# Altium PCB MainBoard.PcbDoc
Units mil, origin at the board's own origin, x right, y up, seen from the top; angles counter-clockwise.
Board outline 3900 x 3590 mil, 2 copper layers (Top Layer, Bottom Layer); 85 components, 109 nets, 361 pads, 95 vias.
Unrouted connection lines stored in the file: 1.
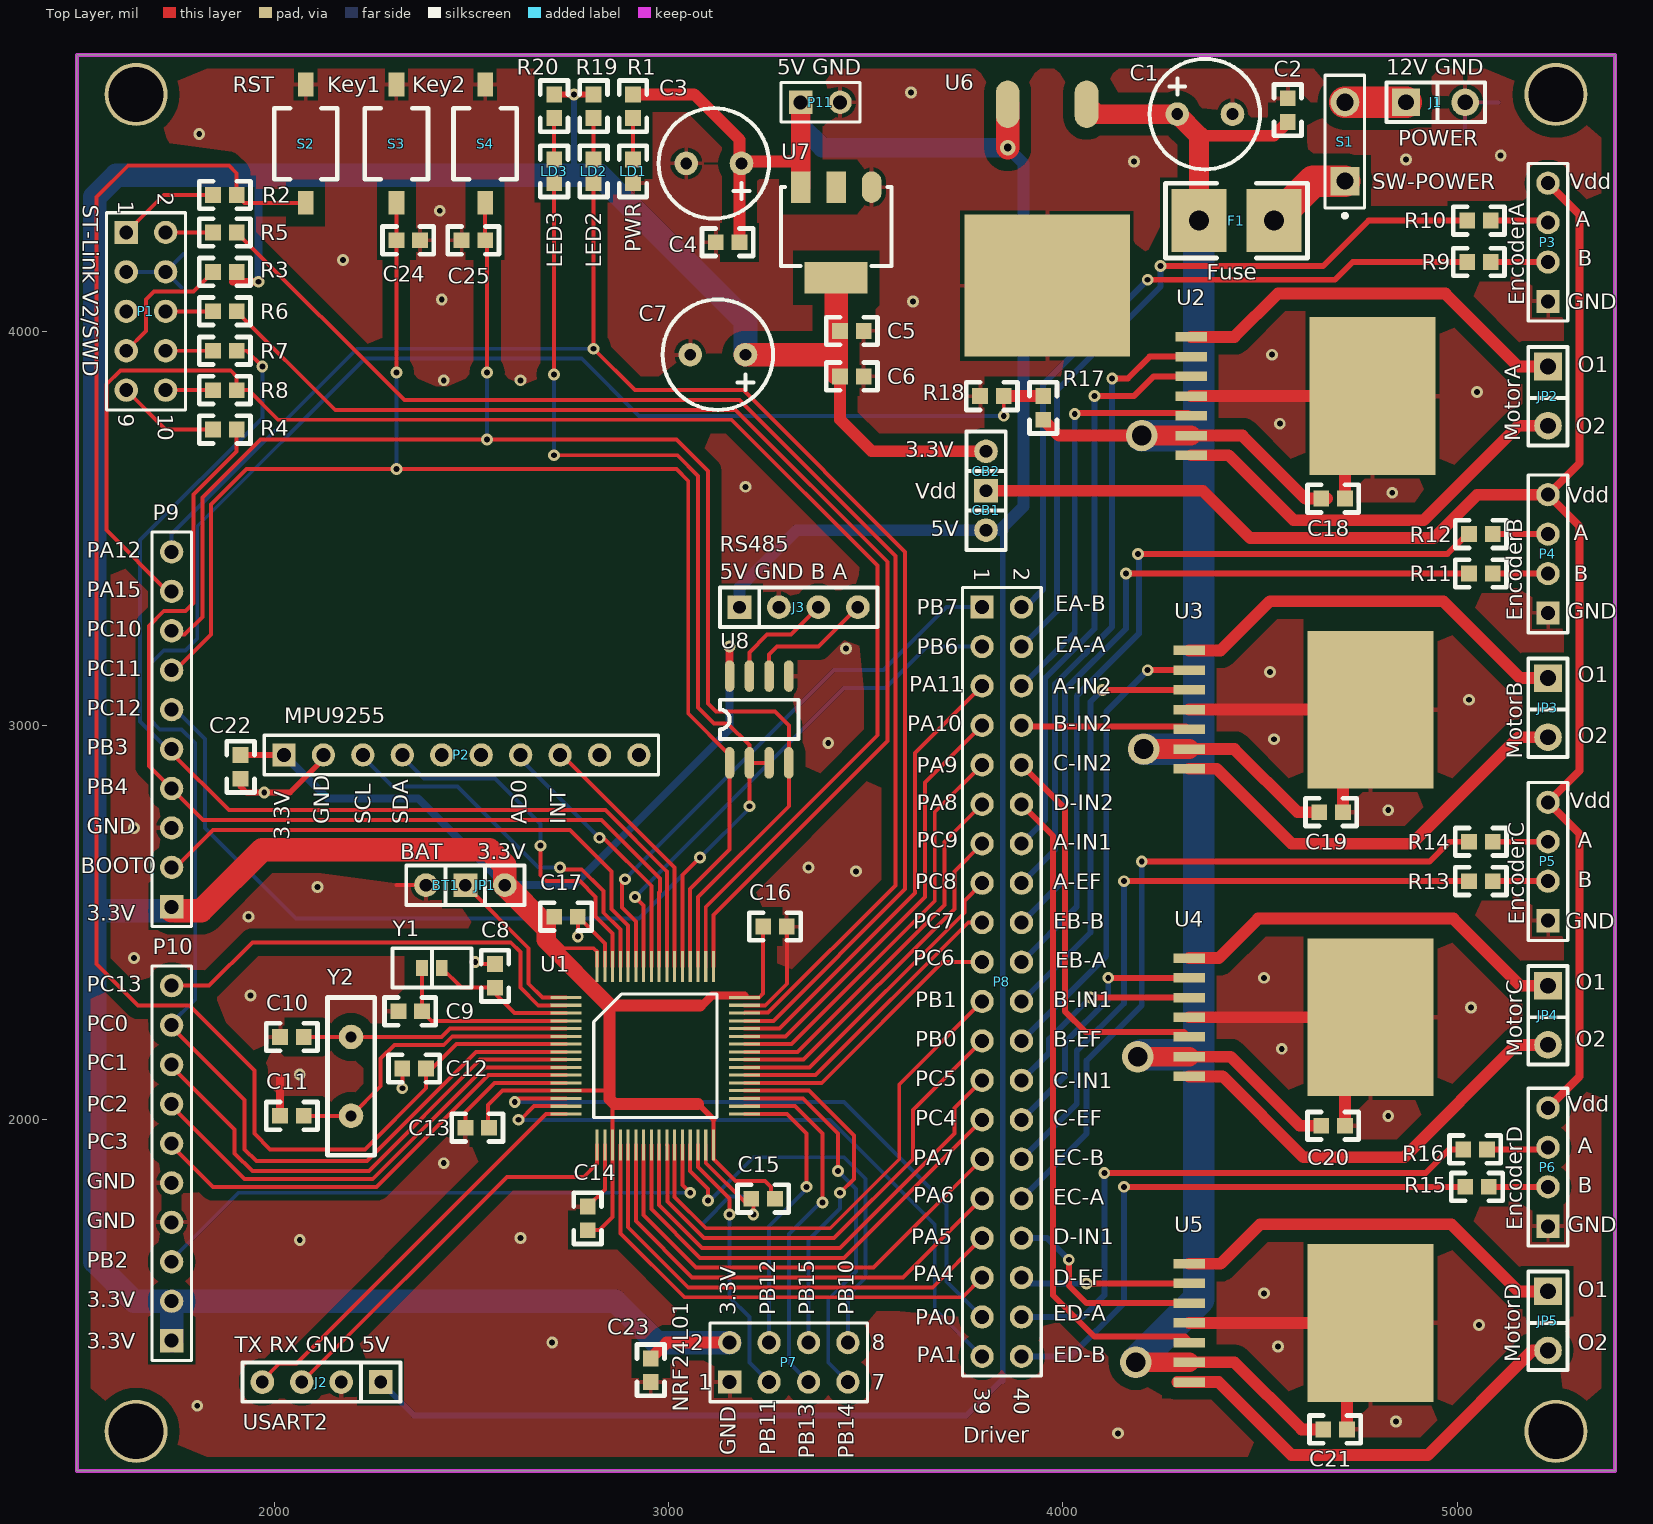
[diagram p0: Top Layer view]
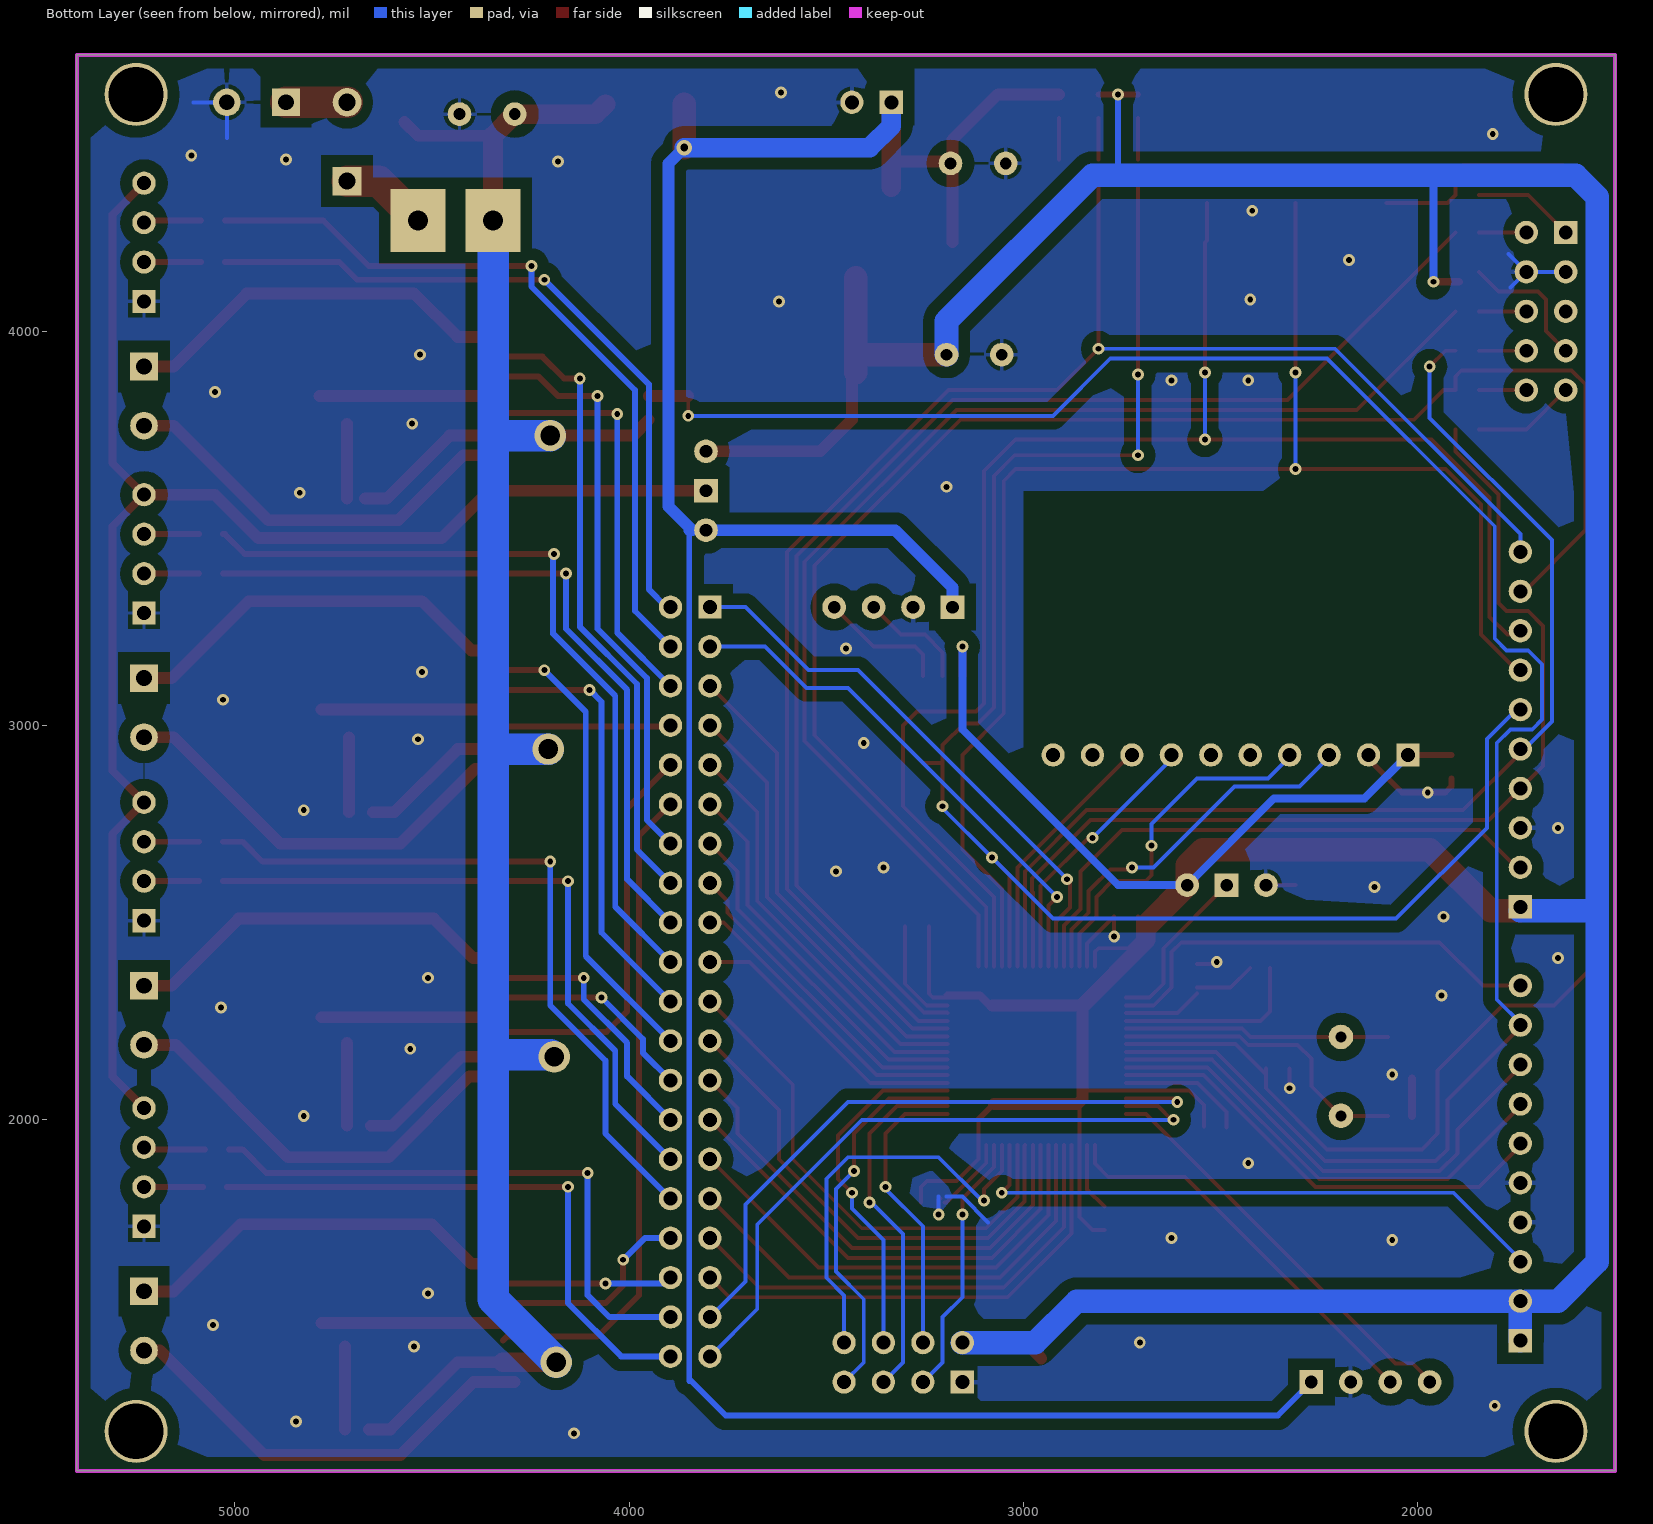
[diagram p1: Bottom Layer view, seen from below]

## Layer stack, top to bottom
Top Solder: solder mask 0.4, Solder Resist, Dk 3.5
Top Layer: signal copper 1.4
Dielectric 1: dielectric 12.6, FR-4, Dk 4.8
Bottom Layer: signal copper 1.4
Bottom Solder: solder mask 0.4, Solder Resist, Dk 3.5

## Board outline
1500,1110 1500,4700 5400,4700 5400,1110

## Design rules (kind name [scope] priority, off if disabled: settings)
Clearance Clearance_poly [InPolygon] p1: gap=30
Clearance [All] p2: gap=8
PolygonConnect PolygonConnect_Via [IsVia] p1: connectstyle=Direct reliefconductorwidth=10 reliefentries=4 polygonreliefangle="90 Angle" airgapwidth=10
PolygonConnect [All] p2: connectstyle=Relief reliefconductorwidth=10 reliefentries=4 polygonreliefangle="90 Angle" airgapwidth=10
RoomDefinition MainBoard [InComponentClass('MainBoard')] p1: confinementstyle=ConfineIn formatcopy=TRUE lockcomponents=FALSE outline 1500,4700 5385,4700 5400,4685 5390,4675 5390,1110 1515,1110 1500,1125
RoutingVias [All] p1: holewidth=28 width=50 viastyle="Through Hole" minholewidth=28 minwidth=50 maxholewidth=28 maxwidth=50
SolderMaskExpansion [All] p1: expansion=4
Width [All] p1: maxlimit=80 minlimit=10 preferedwidth=10
29 further rules are at their usual default settings.

## Components (designator, comment, footprint, x,y, rotation, side; value= is the part's Value field where it differs from the comment)
BT1 "BAT" "SIP2 - duplicate" 2485,2595 r180 top
C1 "470uF/50V" RB2 4290,4550 r0 top
C2 "Cap" 0603 4570,4590 r270 top
C3 "10uF/10V" RB2 3185,4425 r180 top
C4 "Cap" 0603 3120,4225 r0 top
C5 "Cap" 0603 3495,4000 r180 top
C6 "Cap" 0603 3495,3885 r180 top
C7 "47uF/10V" RB2 3195,3940 r180 top
C8 "20P" 0603 2560,2395 r270 top
C9 "20P" 0603 2315,2275 r0 top
C10 "20P" 0603 2075,2210 r180 top
C11 "20P" 0603 2075,2010 r180 top
C12 "" 0603 2385,2130 r180 top
C13 "Cap" 0603 2545,1980 r180 top
C14 "Cap" 0603 2795,1780 r270 top
C15 "Cap" 0603 3210,1800 r0 top
C16 "Cap" 0603 3240,2490 r0 top
C17 "Cap" 0603 2770,2515 r180 top
C18 "Cap" 0603 4715,3575 r180 top
C19 "Cap" 0603 4710,2780 r180 top
C20 "Cap" 0603 4715,1985 r180 top
C21 "Cap" 0603 4720,1215 r180 top
C22 "Cap" 0603 1915,2925 r270 top
C23 "Cap" 0603 2955,1395 r270 top
C24 "Cap" 0603 2370,4230 r180 top
C25 "Cap" 0603 2475,4230 r0 top
CB1 "5V" "SIP2 - duplicate" 3805,3595 r270 top
CB2 "3.3V" "SIP2 - duplicate" 3805,3595 r90 top
F1 "Fuse" 1808Shell 4345,4280 r0 top
J1 "POWER" SIP2-150 4870,4580 r0 top
J2 "USART2" sip4 2270,1335 r180 top
J3 "RS485" sip4 3180,3300 r0 top
JP1 "3.3V" "SIP2 - duplicate" 2485,2595 r0 top
JP2 "MotorA" SIP2-150 5230,3910 r270 top
JP3 "MotorB" SIP2-150 5230,3120 r270 top
JP4 "MotorC" SIP2-150 5230,2340 r270 top
JP5 "MotorD" SIP2-150 5230,1565 r270 top
LD1 "PWR" 0603 2910,4435 r270 top
LD2 "LED2" 0603 2810,4435 r270 top
LD3 "LED3" 0603 2710,4435 r270 top
P1 "ST-Link V2/SWD" HDR2X5 1625,4250 r270 top
P2 "MPU9255" HDR1X10 2025,2925 r0 top
P3 "EncoderA" HDR1X4 5230,4075 r90 top
P4 "EncoderB" HDR1X4 5230,3285 r90 top
P5 "EncoderC" HDR1X4 5230,2505 r90 top
P6 "EncoderD" HDR1X4 5230,1730 r90 top
P7 "NRF24L01" HDR2X4 3155,1335 r0 top
P8 "Driver" HDR2X20 3795,3300 r270 top
P9 "Header 10" HDR1X10 1740,2540 r90 top
P10 "Header 10" HDR1X10 1740,1440 r90 top
P11 "5V GND" HDR1X2 3335,4580 r0 top
R1 "1K" 0603 2910,4540 r90 top
R2 "22" 0603 1905,4345 r180 top
R3 "22" 0603 1905,4150 r180 top
R4 "22" 0603 1905,3750 r180 top
R5 "22" 0603 1845,4250 r0 top
R6 "22" 0603 1845,4050 r0 top
R7 "22" 0603 1845,3950 r0 top
R8 "22" 0603 1845,3850 r0 top
R9 "390" 0603 5085,4175 r180 top
R10 "390" 0603 5085,4280 r180 top
R11 "390" 0603 5090,3385 r180 top
R12 "390" 0603 5090,3485 r180 top
R13 "390" 0603 5090,2605 r180 top
R14 "390" 0603 5090,2705 r180 top
R15 "390" 0603 5080,1830 r180 top
R16 "390" 0603 5075,1925 r180 top
R17 "100K" 0603 3950,3835 r270 top
R18 "10K" 0603 3790,3835 r0 top
R19 "1K" 0603 2810,4540 r90 top
R20 "1K" 0603 2710,4540 r90 top
S1 "SW-POWER" SPST-2 4715,4480 r90 top
S2 "RST" key2 2080,4625 r180 top
S3 "Key1" key2 2310,4625 r180 top
S4 "Key2" key2 2535,4625 r180 top
U1 "" quad64 2740,2310 r0 top
U2 "TLE5205-2G" INF-PG-TO263-7-1_L 4325,3835 r0 top
U3 "TLE5205-2G" INF-PG-TO263-7-1_L 4320,3040 r0 top
U4 "TLE5205-2G" INF-PG-TO263-7-1_L 4320,2260 r0 top
U5 "TLE5205-2G" INF-PG-TO263-7-1_L 4320,1485 r0 top
U6 "7805" ktt 3960,4575 r90 top
U7 "LM1117" SPP3 3515,4365 r180 top
U8 "3082" so-8 3155,2905 r90 top
Y1 "32768" sip2 2350,2385 r0 top
Y2 "8M" XTAL1 2195,2210 r270 top

## Footprints (in the part's own frame and the unit in brackets; to place one, negate y for a bottom-side part, rotate by r counter-clockwise, add the part's x,y. Pads: shape width x height; smd on the part's side, far side on the other; paste and mask are expansions set on the pad)
0603 [mil]
  rect 40x40 smd: 1(0,0) 2(60,0)
  silkscreen extent -35,-35 95,35
1808Shell [mil]
  rect 140x160 hole 50: 1(0,0) 2(190,0)
  silkscreen extent -85,-95 275,95
HDR1X2 [mm] "Connector; Header; 2 Position"
  rect 1.5x1.5 hole 0.9: 1(0,0)
  round 1.5 hole 0.9: 2(2.54,0)
  silkscreen extent -1.27,-1.27 3.81,1.27
HDR1X4 [mm] "Connector; Header; 4 Position"
  rect 1.5x1.5 hole 0.9: 1(0,0)
  round 1.5 hole 0.9: 2(2.54,0) 3(5.08,0) 4(7.62,0)
  silkscreen extent -1.27,-1.27 8.89,1.27
HDR1X10 [mm] "Connector; Header; 10 Position"
  rect 1.5x1.5 hole 0.9: 1(0,0)
  round 1.5 hole 0.9: 2(2.54,0) 3(5.08,0) 4(7.62,0) 5(10.16,0) 6(12.7,0) 7(15.24,0) 8(17.78,0) 9(20.32,0) 10(22.86,0)
  silkscreen extent -1.27,-1.27 24.13,1.27
HDR2X4 [mm] "Connector; Header; 4x2 Position"
  rect 1.5x1.5 hole 0.9: 1(0,0)
  round 1.5 hole 0.9: 2(0,2.54) 3(2.54,0) 4(2.54,2.54) 5(5.08,0) 6(5.08,2.54) 7(7.62,0) 8(7.62,2.54)
  silkscreen extent -1.27,-1.27 8.89,3.81
HDR2X5 [mm] "Connector; Header; 5x2 Position"
  rect 1.5x1.5 hole 0.9: 1(0,0)
  round 1.5 hole 0.9: 2(0,2.54) 3(2.54,0) 4(2.54,2.54) 5(5.08,0) 6(5.08,2.54) 7(7.62,0) 8(7.62,2.54) 9(10.16,0) 10(10.16,2.54)
  silkscreen extent -1.27,-1.27 11.43,3.81
HDR2X20 [mm] "Connector; Header; 20x2 Position"
  rect 1.5x1.5 hole 0.9: 1(0,0)
  round 1.5 hole 0.9: 2(0,2.54) 3(2.54,0) 4(2.54,2.54) 5(5.08,0) 6(5.08,2.54) 7(7.62,0) 8(7.62,2.54) 9(10.16,0) 10(10.16,2.54) 11(12.7,0) 12(12.7,2.54) 13(15.24,0) 14(15.24,2.54) 15(17.78,0) 16(17.78,2.54) 17(20.32,0) 18(20.32,2.54) 19(22.86,0) 20(22.86,2.54) 21(25.4,0) 22(25.4,2.54) 23(27.94,0) 24(27.94,2.54) 25(30.48,0) 26(30.48,2.54) 27(33.02,0) 28(33.02,2.54) 29(35.56,0) 30(35.56,2.54) 31(38.1,0) 32(38.1,2.54) 33(40.64,0) 34(40.64,2.54) 35(43.18,0) 36(43.18,2.54) 37(45.72,0) 38(45.72,2.54) 39(48.26,0) 40(48.26,2.54)
  silkscreen extent -1.27,-1.27 49.53,3.81
INF-PG-TO263-7-1_L [mil] "DPAK, 8-Leads, Body 10x9.25mm, Pitch 1.27mm, IPC High Density"
  rect 80x24 smd: 1(0,150) 2(0,100) 3(0,50) 4(0,0) 5(0,-50) 6(0,-100) 7(0,-150)
  rect 320x400 smd: 8(460,0)
key2 [mil]
  rect 40x60 smd: 1(0,0) 2(0,300)
  silkscreen extent -80,60 80,240
ktt [mil]
  oval 120x60 smd: 1(0,-100) 3(0,100)
  rect 360x420 smd: 2(-460,0)
quad64 [mm]
  oval 2x0.2 smd: 1(0,0)
  rect 2x0.2 smd: 2(0,-0.5) 3(0,-1) 4(0,-1.5) 5(0,-2) 6(0,-2.5) 7(0,-3) 8(0,-3.5) 9(0,-4) 10(0,-4.5) 11(0,-5) 12(0,-5.5) 13(0,-6) 14(0,-6.5) 15(0,-7) 16(0,-7.5) 33(11.5,-7.5) 34(11.5,-7) 35(11.5,-6.5) 36(11.5,-6) 37(11.5,-5.5) 38(11.5,-5) 39(11.5,-4.5) 40(11.5,-4) 41(11.5,-3.5) 42(11.5,-3) 43(11.5,-2.5) 44(11.5,-2) 45(11.5,-1.5) 46(11.5,-1) 47(11.5,-0.5) 48(11.5,0)
  rect 0.2x2 smd: 17(2,-9.5) 18(2.5,-9.5) 19(3,-9.5) 20(3.5,-9.5) 21(4,-9.5) 22(4.5,-9.5) 23(5,-9.5) 24(5.5,-9.5) 25(6,-9.5) 26(6.5,-9.5) 27(7,-9.5) 28(7.5,-9.5) 29(8,-9.5) 30(8.5,-9.5) 31(9,-9.5) 32(9.5,-9.5) 49(9.5,2) 50(9,2) 51(8.5,2) 52(8,2) 53(7.5,2) 54(7,2) 55(6.5,2) 56(6,2) 57(5.5,2) 58(5,2) 59(4.5,2) 60(4,2) 61(3.5,2) 62(3,2) 63(2.5,2) 64(2,2)
  silkscreen extent 1.79,-7.71 9.71,0.22
RB2 [mil]
  round 60 hole 30: 1(0,0) 2(140,0)
  silkscreen extent -70,-140 210,140
sip2 [mil]
  rect 30x40 smd: 1(25,0) 2(75,0)
  silkscreen extent -50,-50 150,50
"SIP2 - duplicate" [mil]
  rect 60x60 hole 32: 1(0,0)
  round 60 hole 32: 2(100,0)
  silkscreen extent -50,-50 150,50
SIP2-150 [mil]
  rect 70x70 hole 40: 1(0,0)
  round 70 hole 40: 2(150,0)
  silkscreen extent -50,-50 200,50
sip4 [mil]
  rect 60x60 hole 32: 1(0,0)
  round 60 hole 32: 2(100,0) 3(200,0) 4(300,0)
  silkscreen extent -50,-50 350,50
so-8 [mil]
  oval 80x24 smd: 1(0,0) 2(0,-50) 3(0,-100) 4(0,-150) 5(220,-150) 6(220,-100) 7(220,-50) 8(220,0)
  silkscreen extent 60,-175 160,25
SPP3 [mil]
  oval 50x80 smd: 1(0,0)
  rect 50x80 smd: 2(90,0) 3(180,0)
  rect 160x80 smd: 4(90,230)
  silkscreen extent -50,0 230,200
SPST-2 [mm] "Switch; 2 Leads"
  rect 1.85x1.85 hole 1.1: 1(-2.54,0)
  round 1.85 hole 1.1: 2(2.54,0)
  silkscreen extent -4.89,-1.27 4.28,1.27
XTAL1 [mil]
  round 62 hole 28: 1(0,0) 2(200,0)
  silkscreen extent -100,-60 300,60

## Part data
BT1: library part BATTERY, "Battery"
C1 C3 C7: library part "CAP POL"
C2 C4 C5 C6 C13 C14 C15 C16 C17 C18 C19 C20 C21 C22 C23 C24 C25: "Capacitor"
C8 C9 C10 C11 C12: library part CAP, "Capacitor"
CB1 CB2: library part "Circuit Breaker", "Circuit Breaker"
F1: library part "Fuse 2"
J1 JP1: library part CON2, "Connector"
J2 J3: library part CON4, "Connector"
JP2 JP3 JP4 JP5 P11: library part "Header 2", "Header, 2-Pin"
LD1 LD2 LD3: library part PHOTO
P1: library part "Header 5X2", "Header, 5-Pin, Dual row"
P2: library part "Header 10", "Header, 10-Pin"
P3 P4 P5 P6: library part "Header 4", "Header, 4-Pin"
P7: library part "Header 4X2", "Header, 4-Pin, Dual row"
P8: library part "Header 20X2", "Header, 20-Pin, Dual row"
P9 P10: "Header, 10-Pin"
R1 R2 R3 R4 R5 R6 R7 R8 R17 R18 R19 R20: library part Resistor_ST, "Resistor 0402 / 0603 / 0805"
R9 R10 R11 R12 R13 R14 R15 R16: library part RES
S1: library part SW-SPST, "Single-Pole, Single-Throw Switch"
S2 S3 S4: library part SW-PB, "Switch"
U1: library part STM32F103R8
U2 U3 U4 U5: "5 A H-Bridge for DC-Motor Applications, 6 to 40 V, 220 mOhm RDS(on), PG-TO263-7-1, Reel, Green"
U6: library part LM330KC, "3-Terminal Positive Regulator"
U8: library part 75176
Y1 Y2: library part CRYSTAL, "Crystal"

## Free pads (board coordinates)
  round 80 hole 50: 0(4200,3735) 1(4205,2940) 2(4190,2160) 3(4185,1385)
  round 160 hole 140: 0(5250,1210) 1(5250,4600) 2(1650,4600) 3(1650,1210)

## Via types
v1: diameter 30, hole 15, Top Layer to Bottom Layer, 94 vias
v2: diameter 40, hole 20, Top Layer to Bottom Layer, 1 vias

## Nets (pads, with @x,y where several pads share a name; then routed paths per layer and width w, separated by ;. In a path a pad name is that pad's centre, name@x,y a point inside that pad or via, vN(x,y) a via of type N, cw(c..) or ccw(c..) an arc to the next point about the centre after c; other vN are vias at no path point)
3V3: C5.2 C6.2 C7.1 C13.1 C14.2 C15.2 C16.1 C17.2 C22.1 C23.1 CB2.2 JP1.2 P2.1 P7.2 P9.1 P10.1 P10.2 R3.1 R19.2 R20.2 U1.13 U1.19 U1.32 U1.48 U1.64 U7.2 U7.4 U8.8 | length 13999
  Top Layer w10: C13.1@2542.5,1982.5 2542.5,2037.5 2578.78,2073.78 U1.13 2841.22,2073.78 2850,2065 ; C17.2 2710,2460 2735,2435 2810,2435 2818.74,2426.26 U1.64 ; C14.2 2825,1720 2858.11,1753.11 U1.19 2858.11,2045 ; 3114.01,2000.98 U1.32 3114.01,1900.98 3170,1845 3245,1845 3260,1830 C15.2@3260,1790 ; U1.48 3230,2310 3240,2320 C16.1
  Top Layer w15: C22.1 P2.1 ; R20.2 v1(2760,4600) R19.2 ; 3075,2040 3114.01,2000.98
  Top Layer w20: 1895,4125 v1(1960,4125) ; 3080,2290 3085,2290 3110,2315 3192.76,2315 ; U8.8 v1(3155,3200)
  Top Layer w30: C23.1 2995,1435 P7.2 ; 3075,2040 2863.11,2040 2850,2053.11 2850,2065 2850,2290 3080,2290 ; C6.2 3435,3775 3515,3695 CB2.2
  Top Layer w40: 2685,2495 2685,2455 2850,2290
  Top Layer w60: P9.1@1740,2530 1815,2530 1970,2685 2545,2685 2585,2645 JP1.2@2585,2605 ; JP1.2 2685,2495 ; C7.1 3420,3940 ; C6.2@3425,3895 U7.4
  Bottom Layer w15: 2760,4395 v1(2760,4600)
  Bottom Layer w20: v1(1960,4125) 1960,4395 ; P2.1 2135,2815 2365,2815 JP1.2 2760,2595 3155,2990 v1(3155,3200)
  Bottom Layer w60: 1550,2530 P9.1@1740,2530 ; P10.2@1725,1540 1645,1540 1545,1640 1545,4340 1600,4395 1960,4395 2760,4395 2825,4395 3195,4025 C7.1 ; P10.1 P10.2 2865,1540 2970,1435 P7.2
5V: C3.1 C4.2 CB1.2 J2.1 J3.1 P11.1 R1.2 U6.3 U7.3 | length 7219.4
  Top Layer w30: R1.2 3065,4600 3180,4485 C3.1@3180,4430 ; C4.2 C3.1@3180,4430 ; 3330,4430 C3.1@3180,4430
  Top Layer w50: U7.3 P11.1
  Top Layer w60: v2(3860,4465) U6.3
  Bottom Layer w15: J2.1 2355,1250 3755,1250 3845,1340 ; 3847.47,1337.47 3847.47,3495
  Bottom Layer w30: J3.1 3180,3350 3325,3495 CB1.2 ; 3847.47,3495 3840,3495 3900,3555 3900,4425 v2(3860,4465)
  Bottom Layer w50: P11.1 3335,4520 3390,4465 v2(3860,4465)
485-A: J3.4 U8.6 | length 329.7
  Top Layer w10: U8.6 3255,3180 3275,3200 3380,3200 J3.4
485-B: J3.3 U8.7 | length 282.6
  Top Layer w10: U8.7 3205,3185 3250,3230 3310,3230 J3.3
AIN0: P10.9 R17.1 R18.2 U1.8 | length 5220.8
  Top Layer w10: P10.9@1735,2240 1925,2050 1925,1925 1955,1895 2235,1895 2512.2,2172.2 U1.8 ; v1(3850,3785) R18.2
  Top Layer w30: R18.2 R17.1
  Bottom Layer w10: P10.9@1735,2240 1800,2305 1800,2955 1765,2990 1710,2990 1685,3015 1685,3155 1720,3190 1775,3190 1805,3220 1805,3505 2230,3930 2780,3930 2925,3785 v1(3850,3785)
AIN4: P10.10 U1.2 | length 1169.4
  Top Layer w10: P10.10@1735,2340 1835,2340 1945,2450 2600,2450 2625,2425 2625,2335 2669.68,2290.32 U1.2
BOOT0: P9.2 U1.60 | length 1460.8
  Top Layer w10: P9.2@1740,2630 1845,2735 2750,2735 2855,2630 2855,2535 2897.48,2492.52 U1.60
CS-SP2: P7.4 U1.33 | length 747.2
  Top Layer w10: U1.33 3300.28,2014.72 3350,1965 v1(3350,1830)
  Bottom Layer w10: P7.4 3255,1730 3350,1825 v1(3350,1830)
GND: BT1.2 C1.2 C2.1 C3.2 C4.1 C5.1 C6.1 C7.2 C8.1 C9.1 C10.2 C11.2 C12.2 C13.2 C14.1 C15.1 C16.2 C17.1 C18.1 C19.1 C20.1 C21.1 C22.2 C23.2 C24.1 C25.1 J1.2 J2.2 J3.2 LD1.2 P1.3 P1.4 P2.2 P3.1 P4.1 P5.1 P6.1 P7.1 P9.3 P10.4 P10.5 P11.2 R18.1 S2.1 S3.1 S4.1 U1.12 U1.18 U1.31 U1.47 U1.63 U2.4 U2.8 U3.4 U3.8 U4.4 U4.8 U5.4 U5.8 U6.2 U7.1 U8.5 | length 4979.3
  Top Layer w10: 2310,2595 BT1.2 ; v1(2325,2080) C12.2 ; C13.2 2485,2020 2558.47,2093.47 U1.12 ; v1(2510,2400) 2515,2395 C8.1 ; v1(2770,2465) C17.1 2838.43,2446.57 U1.63 ; C14.1 2838.43,1823.42 U1.18 ; U1.31 3094.33,1890.67 3195,1790 C15.1@3200,1790 ; U1.47 3245.32,2290.32 3300,2345 C16.2 ; C15.1 3215,1795 v1(3215,1760)
  Top Layer w15: C22.2 1915,2845 1930,2830 v1(1975,2830) 2040,2830 2125,2915 P2.2
  Top Layer w20: C11.2 2015,2105
  Top Layer w30: U5.4 U5.8 ; U4.4 U4.8 ; U3.4 U3.8 ; U2.4 U2.8 ; C19.1 U3.8@4710,2970 ; C20.1 U4.8@4715,2195 ; C18.1 U2.8@4715,3765 ; C21.1 U5.8@4720,1425
  Bottom Layer w10: P1.3 P1.4 ; 1765,4110 P1.4 ; 1770,4195 P1.4 ; 3090,1740 3155,1805 3195,1805 ; v1(3215,1760) 3215,1805 ; 5020,4490 J1.2 5105,4580
  other v1: 4140,1205 4845,1235 1805,1275 4545,1425 2705,1435 5055,1480 4510,1560 2065,1695 2625,1700 2430,1890 4825,2010 2065,2115 4555,2180 5035,2285 1940,2315 4510,2360 1645,2410 1935,2515 2110,2590 3475,2630 3355,2640 1645,2740 4825,2785 3405,2955 4535,2965 5030,3065 4525,3135 3450,3195 4835,3590 3195,3605 4550,3765 5050,3845 2430,3875 2625,3875 4530,3940 3620,4075 2425,4080 2175,4180 2420,4305 4180,4430 4870,4435 5110,4445 1810,4500 3615,4605
JTCK/SWCLK: R6.2 U1.49 | length 3121.9
  Top Layer w10: R6.2 2155,3800 3170,3800 3555,3415 3555,2960 3114.01,2519.01 U1.49
JTDI: P9.9 R8.2 U1.50 | length 3988
  Top Layer w10: P9.9@1735,3335 1575,3495 1575,3865 1610,3900 1890,3900 1905,3885 R8.2 1935,3850 2010,3775 3160,3775 3530,3405 3530,2975 3094.33,2539.33 U1.50
JTDO/TRACESWO: P9.5 R7.2 U1.55 | length 2844.1
  Top Layer w10: P9.5@1740,2930 1885,2785 2840,2785 2996,2629 2996,2388.84 U1.55 ; R7.2 1930,3950 v1(1970,3910)
  Bottom Layer w10: P9.5@1740,2930 1660,3010 1660,3470 1970,3780 v1(1970,3910)
JTMS/SWDIO: R5.2 U1.46 | length 3361.5
  Top Layer w10: R5.2 2330,3825 3180,3825 3575,3430 3575,2594.54 3252.77,2272.32 3194.44,2272.32 U1.46
MISO-SP2: P7.7 U1.35 | length 977.5
  Top Layer w10: U1.35 3340.91,2054.09 3430,1965 v1(3430,1870) v1@3430,1865
  Bottom Layer w10: v1(3430,1870) 3475,1825 3475,1615 3405,1545 3405,1385 P7.7
MOSI-SP2: P7.6 U1.36 | length 897
  Top Layer w10: U1.36 3356.22,2073.78 3470,1960 3470,1850 v1(3435,1815)
  Bottom Layer w10: P7.6 3355,1695 3435,1775 v1(3435,1815)
NetBT1_1: BT1.1 JP1.1 U1.1 | length 435.8
  Top Layer w10: JP1.1@2485,2605 JP1.1 2645,2435 2645,2345 2680,2310 U1.1
NetC8_2: C8.2 U1.3 Y1.2 | length 356.2
  Top Layer w10: Y1.2 2475,2335 C8.2 ; C8.2@2560,2320 2609.37,2270.63 U1.3
NetC9_2: C9.2 U1.4 Y1.1 | length 485
  Top Layer w10: Y1.1 C9.2 2399.05,2250.95 U1.4
NetC10_1: C10.1 U1.5 Y2.1 | length 673.8
  Top Layer w10: C10.1 Y2.1 2424.54,2210 2445.8,2231.26 U1.5
NetC11_1: C11.1 U1.6 Y2.2 | length 789.5
  Top Layer w10: C11.1 Y2.2 2270,2085 2270,2155 2305,2190 2430,2190 2451.57,2211.57 U1.6
NetCB1_1: CB1.1 CB2.1 P3.4 P4.4 P5.4 P6.4 | length 4064.1
  Top Layer w20: P6.4 5310,2110 5310,2725 P5.4 5310,2885 5310,3505 P4.4 5310,3665 5310,4295 P3.4
  Top Layer w30: CB2.1 4355,3595 4475,3475 4940,3475 5050,3585 P4.4
NetF1_2: F1.2 S1.1 | length 221.4
  Top Layer w80: F1.2 4635,4380 S1.1
NetJP2_1: JP2.1 U2.1 | length 1027.2
  Top Layer w30: U2.1 4435,3985 4545,4095 4970,4095 5155,3910 JP2.1
NetJP2_2: JP2.2 U2.7 | length 1072.8
  Top Layer w30: U2.7 4420,3685 4585,3520 4915,3520 5155,3760 JP2.2
NetJP3_1: JP3.1 U3.1 | length 1042.5
  Top Layer w30: U3.1 4400,3190 4525,3315 4965,3315 5160,3120 JP3.1
NetJP3_2: JP3.2 U3.7 | length 1100.5
  Top Layer w30: U3.7 4390,2890 4580,2700 4885,2700 5155,2970 JP3.2
NetJP4_1: JP4.1 U4.1 | length 1021.8
  Top Layer w30: U4.1 4395,2410 4495,2510 4990,2510 5160,2340 JP4.1
NetJP4_2: JP4.2 U4.7 | length 1113
  Top Layer w30: U4.7 4405,2110 4610,1905 4865,1905 5150,2190 JP4.2
NetJP5_1: JP5.1 U5.1 | length 1021.8
  Top Layer w30: U5.1 4400,1635 4500,1735 4985,1735 5155,1565 JP5.1
NetJP5_2: JP5.2 U5.7 | length 1126.4
  Top Layer w30: U5.7@4290,1335 4395,1335 4580,1150 4925,1150 5190,1415 JP5.2
NetLD1_1: LD1.1 R1.1 | length 105
  Top Layer w10: LD1.1 R1.1
NetLD2_1: LD2.1 R19.1 | length 105
  Top Layer w10: LD2.1 R19.1
NetLD3_1: LD3.1 R20.1 | length 105
  Top Layer w10: LD3.1 R20.1
NetP1_1: P1.1 R2.2 | length 259.4
  Top Layer w10: P1.1 1720,4345 R2.2
NetP1_2: P1.2 R5.1 | length 120
  Top Layer w10: P1.2 R5.1
NetP1_6: P1.6 R6.1 | length 120
  Top Layer w10: P1.6 R6.1
NetP1_7: P1.7 R3.2 | length 349.7
  Top Layer w10: P1.7 1675,4000 1675,4080 1695,4100 1795,4100 R3.2
NetP1_8: P1.8 R7.1 | length 120
  Top Layer w10: P1.8 R7.1
NetP1_9: P1.9 R4.2 | length 261.4
  Top Layer w10: P1.9 1725,3750 R4.2
NetP1_10: P1.10 R8.1 | length 120
  Top Layer w10: P1.10 R8.1
NetP3_2: P3.2 R9.1 | length 145
  Top Layer w15: R9.1 P3.2
NetP3_3: P3.3 R10.1 | length 140
  Top Layer w15: R10.1 P3.3@5225,4280
NetP4_2: P4.2 R11.1 | length 140
  Top Layer w15: R11.1 P4.2
NetP4_3: P4.3 R12.1 | length 140
  Top Layer w15: R12.1 P4.3
NetP5_2: P5.2 R13.1 | length 140
  Top Layer w15: R13.1 P5.2
NetP5_3: P5.3 R14.1 | length 140
  Top Layer w15: R14.1 P5.3
NetP6_2: P6.2 R15.1 | length 150
  Top Layer w15: R15.1 P6.2
NetP6_3: P6.3 R16.1 | length 150
  Top Layer w15: R16.1 P6.3@5225,1925
NetP8_2: P8.2 R9.2 | length 1804.1
  Top Layer w15: v1@4210,4135 v1(4215,4130) 4690,4130 4735,4175 R9.2
  Bottom Layer w15: P8.2 3905,3300 3950,3345 3950,3865 v1(4215,4130)
NetP8_4: P8.4 R10.2 | length 1936.1
  Top Layer w15: v1(4247.5,4165) 4660,4165 4775,4280 R10.2
  Bottom Layer w15: P8.4 3985,3290 3985,3850 4247.5,4112.5 v1(4247.5,4165)
NetP8_6: P8.6 U2.5 | length 1034
  Top Layer w15: v1@4030,3792.5 4317.5,3792.5 U2.5
  Bottom Layer w15: P8.6 4030,3235 v1@4030,3780
  other v1: 4030,3790
NetP8_8: P8.8 U3.5 | length 429.1
  Top Layer w15: P8.8 3897.5,2997.5 4312.5,2997.5 U3.5
NetP8_10: P8.10 U4.5 | length 1012.5
  Top Layer w15: P8.10 4005,2790 4005,2275 4057.5,2222.5 4307.5,2222.5 U4.5
NetP8_12: P8.12 U5.5 | length 1670.8
  Top Layer w15: P8.12 3975,2720 3975,1555 4080,1450 4310,1450 U5.5@4320,1440
NetP8_14: P8.14 U2.3 | length 1477.3
  Top Layer w15: v1(4080,3835) 4180,3835 4230,3885 U2.3
  Bottom Layer w15: P8.14 3955,2760 3955,3120 4080,3245 v1(4080,3835)
NetP8_16: P8.16 U2.2 | length 1598.1
  Top Layer w15: v1(4125,3880) 4165,3880 4220,3935 U2.2
  Bottom Layer w15: P8.16 3980,2685 3980,3105 4125,3250 v1(4125,3880)
NetP8_18: P8.18 R11.2 | length 1864.8
  Top Layer w15: v1(4160,3385) R11.2
  Bottom Layer w15: P8.18 4005,2610 4005,3090 4160,3245 v1(4160,3385)
NetP8_20: P8.20 R12.2 | length 2020
  Top Layer w15: v1(4190,3435) 4975,3435 5025,3485 R12.2
  Bottom Layer w15: P8.20 4035,2540 4035,3075 4192.5,3232.5 4192.5,3432.5 v1(4190,3435)
NetP8_22: P8.22 U3.3 | length 1094.9
  Top Layer w15: v1(4100,3090) U3.3
  Bottom Layer w15: P8.22 4070,2475 4070,3060 v1(4100,3090)
NetP8_24: P8.24 U3.2 | length 1177.5
  Top Layer w15: v1(4215,3140) U3.2
  Bottom Layer w15: P8.24 4110,2415 4110,3035 v1(4215,3140)
NetP8_26: P8.26 U4.3 | length 532.5
  Top Layer w15: v1(4070,2310) U4.3
  Bottom Layer w15: P8.26 3965,2170 3965,2205 v1(4070,2310)
NetP8_28: P8.28 U4.2 | length 656.1
  Top Layer w15: v1(4115,2360) U4.2
  Bottom Layer w15: P8.28 4005,2110 4005,2195 4115,2305 v1(4115,2360)
NetP8_30: P8.30 R13.2 | length 1687.7
  Top Layer w15: v1(4155,2605) R13.2
  Bottom Layer w15: P8.30 4035,2040 4035,2175 4155,2295 v1(4155,2605)
NetP8_32: P8.32 R14.2 | length 1832
  Top Layer w15: v1(4200,2655) 4930,2655 4980,2705 R14.2
  Bottom Layer w15: P8.32 4060,1965 4060,2150 4200,2290 v1(4200,2655)
NetP8_34: P8.34 U5.3 | length 531.4
  Top Layer w15: v1(4015,1645) 4015,1580 4060,1535 U5.3
  Bottom Layer w15: P8.34 3960,1700 v1(4015,1645)
NetP8_36: P8.36 U5.2 | length 431.2
  Top Layer w15: v1(4060,1585) U5.2
  Bottom Layer w15: P8.36 3910,1585 v1(4060,1585)
NetP8_38: P8.38 R16.2 | length 1477.6
  Top Layer w15: v1(4105,1865) 4920,1865 4980,1925 R16.2
  Bottom Layer w15: P8.38 4050,1500 4105,1555 v1(4105,1865)
NetP8_40: P8.40 R15.2 | length 1475.9
  Top Layer w15: v1(4155,1830) R15.2
  Bottom Layer w15: P8.40 4020,1400 4155,1535 v1(4155,1830)
NJTRST: P9.4 R4.1 U1.56 | length 2614.6
  Top Layer w10: R4.1 1905,3695 1795,3585 1795,3310 1775,3290 1720,3290 1682.5,3252.5 1682.5,2897.5 1820,2760 2830,2760 2978,2612 2978,2578.4 2976.22,2576.62 U1.56
NRST: C12.1 R2.1 S2.2 U1.7 | length 4204.2
  Top Layer w10: S2.2 1925,4325 R2.1 1905,4400 1885,4420 1630,4420 1550,4340 1550,2395 1655,2290 1785,2290 1950,2125 1950,1965 1990,1925 2230,1925 2385,2080 C12.1@2385,2115 ; C12.1 C12.1@2385,2115 ; U1.7 2461.89,2191.89 C12.1@2385,2115
PA4: P8.35 U1.20 | length 1228.9
  Top Layer w10: U1.20 2877.8,1712.2 3040,1550 3745,1550 P8.35
PA5: P8.33 U1.21 | length 1220.9
  Top Layer w10: U1.21 2897.48,1727.52 3050,1575 3670,1575 P8.33
PA12: LD2.2 P9.10 U1.45 | length 4133.6
  Top Layer w10: LD2.2 v1(2810,3955) 2915,3850 3190,3850 3600,3440 3600,2585 3265.95,2250.95 U1.45
  Bottom Layer w10: P9.10 1740,3485 2210,3955 v1(2810,3955)
PB0: P8.23 U1.26 | length 1260.3
  Top Layer w10: U1.26 2997.59,1934.3 2997.59,1792.41 3090,1700 3420,1700 3620,1900 3620,2025 P8.23
PB1: P8.21 U1.27 | length 1293.3
  Top Layer w10: U1.27 3015.59,1804.41 3095,1725 3410,1725 3585,1900 3585,2090 P8.21
PB2: P10.3 U1.28 | length 1521.6
  Top Layer w10: U1.28 3035.28,1834.72 v1(3055,1815)
  Bottom Layer w10: P10.3@1735,1640 1910,1815 v1(3055,1815)
PB5: P2.7 U1.57 | length 679.4
  Top Layer w10: v1(2825,2715) 2835,2715 2956.53,2593.47 U1.57
  Bottom Layer w10: P2.7 2625,2915 v1(2825,2715)
PC1: P10.8 U1.9 | length 1269
  Top Layer w10: P10.8@1735,2140 1900,1975 1900,1915 1945,1870 2240,1870 2522.52,2152.52 U1.9
PC2: P10.7 U1.10 | length 1200.9
  Top Layer w10: P10.7@1735,2040 1925,1850 2250,1850 2532.84,2132.84 U1.10
PC3: P10.6 U1.11 | length 1167.8
  Top Layer w10: P10.6@1735,1940 1845,1830 2260,1830 2543.15,2113.15 U1.11
PC4: P8.27 U1.24 | length 1197.1
  Top Layer w10: U1.24 2956.53,1773.46 3080,1650 3445,1650 P8.27
PC5: P8.25 U1.25 | length 1230.2
  Top Layer w10: U1.25 2976.22,1783.78 3085,1675 3435,1675 3725,1965 3725,2030 P8.25
PC8: P8.15 U1.39 | length 813.3
  Top Layer w10: U1.39 3357.84,2132.84 3750,2525 3750,2555 P8.15
PC9: P8.13 U1.40 | length 884.7
  Top Layer w10: U1.40 3342.52,2152.52 3725,2535 3725,2630 P8.13
PC12: LD3.2 P9.6 U1.53 U8.2 U8.3 | length 4265.1
  Top Layer w10: v1(2710,3685) 3022.46,3685 3075,3632.46 3075,3045 3115,3005 3150,3005 3205,2950 U8.2 ; v1(2710,3890) LD3.2 ; U1.53 3035.28,2620.28 v1(3080,2665) ; v1(3205,2795) U8.2 ; U8.3 U8.2
  Bottom Layer w10: P9.6@1740,3030 1760,3030 1825,2965 1825,2740 2055,2510 2925,2510 v1(3080,2665) v1@3207.5,2792.5 ; v1(2710,3685) v1(2710,3890)
PD2: P2.8 U1.54 | length 658.1
  Top Layer w10: P2.8@2727.5,2927.5 3015.59,2639.41 U1.54
RXD2: J2.3 U1.17 | length 1025.4
  Top Layer w10: J2.3 2590,1855 2785,1855 2818.74,1888.74 U1.17
RXD3: P7.3 U1.30 | length 660.7
  Top Layer w10: U1.30 3074.64,1880.36 3155,1800 3155,1775
  Bottom Layer w10: v1(3155,1760) 3155,1550 3205,1500 3205,1385 P7.3
RXD4: C24.2 P9.7 S3.2 U1.52 U8.1 | length 3727.3
  Top Layer w10: P9.7@1740,3130 1840,3230 1840,3560 1930,3650 v1(2310,3650) 3020,3650 3050,3620 3050,3030 3155,2925 U8.1 3155,2685 3054.96,2584.96 U1.52 ; v1(2310,3895) C24.2 S3.2
  Bottom Layer w10: v1@2310,3645 v1(2310,3895)
SCK-SP2: P7.5 U1.34 | length 913.4
  Top Layer w10: U1.34 3320.59,2034.41 3390,1965 v1(3390,1790)
  Bottom Layer w10: P7.5 3305,1385 3305,1710 v1@3387.5,1792.5
SCL1: P2.3 U1.61 | length 962.7
  Top Layer w10: v1@2725,2635 2780,2635 2829,2586 2829,2585.95 2835,2579.95 2835,2525 2877.8,2482.2 U1.61
  Bottom Layer w10: P2.3 2225,2920 2300,2845 2465,2845 2670,2640 v1(2725,2640)
SDA1: P2.4 U1.62 | length 912.3
  Top Layer w10: v1(2675,2695) 2675,2620 2690,2605 2775,2605 2815,2565 2815,2515 2858.11,2471.89 U1.62
  Bottom Layer w10: P2.4 2325,2920 2380,2865 2560,2865 2675,2750 v1(2675,2695)
TIM1-1: P8.11 U1.41 | length 956
  Top Layer w10: U1.41 3327.2,2172.2 3700,2545 3700,2705 P8.11
TIM1-2: P8.9 U1.42 | length 1027.4
  Top Layer w10: U1.42 3311.89,2191.89 3675,2555 3675,2780 P8.9
TIM1-3: P8.7 U1.43 | length 1098.7
  Top Layer w10: U1.43 3296.57,2211.57 3650,2565 3650,2855 P8.7
TIM1-4: P8.5 U1.44 | length 1170
  Top Layer w10: U1.44 3281.26,2231.26 3625,2575 3625,2930 P8.5
TIM3-1: P8.31 U1.22 | length 1213
  Top Layer w10: U1.22 2917.16,1742.84 3060,1600 3595,1600 P8.31
TIM3-2: P8.29 U1.23 | length 1205
  Top Layer w10: U1.23 2936.85,1758.15 3070,1625 3520,1625 P8.29
TIM4-1: P8.3 U1.58 | length 1328.3
  Top Layer w10: v1(2915,2565) 2936.85,2543.15 U1.58
  Bottom Layer w10: v1(2915,2565) 3445,3095 3550,3095 3655,3200 P8.3
TIM4-2: P8.1 U1.59 | length 1429.9
  Top Layer w10: v1(2890,2610) 2882,2602 2882,2538 2917.16,2502.84 U1.59
  Bottom Layer w10: v1(2890,2610) 3420,3140 3545,3140 3705,3300 P8.1
TIM5-1: P8.37 U1.14 | length 1658.7
  Top Layer w10: v1(2610,2045) 2619.09,2054.09 U1.14
  Bottom Layer w10: v1(2610,2045) 3445,2045 3705,1785 3705,1590 P8.37
TIM5-2: P8.39 U1.15 | length 1682.3
  Top Layer w10: v1@2622.5,1997.5 2659.41,2034.41 U1.15
  Bottom Layer w10: v1(2620,2000) 3410,2000 3675,1735 3675,1520 P8.39
TIM8-1: P8.19 U1.37 | length 729.2
  Top Layer w10: U1.37 3388.47,2093.47 3695,2400 P8.19
TIM8-2: P8.17 U1.38 | length 762.5
  Top Layer w10: U1.38 3373.15,2113.15 3760,2500 P8.17
TXD2: J2.4 U1.16 | length 1049.9
  Top Layer w10: J2.4@1970,1339 2013,1382 2057,1382 2689.72,2014.72 U1.16
TXD3: P7.8 U1.29 | length 1056.6
  Top Layer w10: U1.29 3054.96,1870.04 3100,1825 v1@3100,1800
  Bottom Layer w10: v1(3100,1795) 3105,1795 3215,1905 3445,1905 3500,1850 3500,1600 3455,1555 P7.8
TXD4: C25.2 P9.8 S4.2 U1.51 U8.4 | length 3902.2
  Top Layer w10: P9.8@1740,3230 1773,3230 1818,3275 1818,3578 1965,3725 v1(2540,3725) 3020,3725 3100,3645 3100,3055 3120,3035 3270,3035 3305,3000 U8.4 3305,2795 3074.64,2564.64 U1.51 ; S4.2 C25.2 2540,4225 v1(2540,3895)
  Bottom Layer w10: v1(2540,3725) v1(2540,3895)
VBAT: J1.1 S1.2 | length 155
  Top Layer w80: S1.2 J1.1
VSS: C1.1 C2.2 C18.2 C19.2 C20.2 C21.2 F1.1 pad.0@4200,3735 pad.1@4205,2940 pad.2@4190,2160 pad.3@4185,1385 R17.2 U2.6 U3.6 U4.6 U5.6 U6.1 | length 6515.9
  Top Layer w30: R17.2 3990,3735 pad.0@4200,3735 ; U5.6 4435,1385 4605,1215 C21.2 ; U4.6 4425,2160 4600,1985 C20.2 ; U3.6 4435,2940 4595,2780 C19.2 ; U2.6 4455,3735 4615,3575 C18.2 C18.2@4670,3575 ; 4345,4495 4535,4495 C2.2
  Top Layer w50: U6.1 4085,4550 C1.1 4345,4495 F1.1 ; pad.3@4185,1385 U5.6 ; pad.0@4200,3735 U2.6 ; pad.1@4205,2940 U3.6 ; pad.2@4210,2160 U4.6
  Bottom Layer w80: pad.3@4185,1385 4345,1545 4345,2165 ; pad.2@4200,2165 4345,2165 ; pad.0@4200,3735 4335,3735 ; pad.1@4205,2940 4330,2940 ; F1.1 4345,2165
pads on no net: P1.5 P2.5 P2.6 P2.9 P2.10

## Polygon pours and split planes (outlines as drawn)
GND on Top Layer "BottomLayer-No Net" (solid, remove dead copper, pour order 4): 1500,4700 5400,4700 5400,1110 1500,1110 1500,4700
GND on Bottom Layer "BottomLayer-No Net" (solid, remove dead copper, pour order 2): 1500,4700 5400,4700 5400,1115 5395,1110 1500,1110 1500,4700

## Keep-outs
Keep-Out Layer:
  the board outline again, w10

## Other copper
Multi-Layer:
  pour cut-out: 1880,3590 1885,3595 3000,3595 3000,2840 2980,2820 2960,2840 1875,2840 1875,3555 1910,3590

## Silkscreen, mask and mechanical layers (free items; w line width, h text height)
Top Overlay:
  text "12V GND" at 4820,4650 h40
  text "Vdd" at 5285,4360 h40
  text "A" at 5300,4265 h40
  text "B" at 5305,4165 h40
  text "GND" at 5280,4055 h40
  text "O1" at 5305,3895 h40
  text "O2" at 5300,3740 h40
  text "Vdd" at 3625,3575 h40
  text "Vdd" at 5280,3565 h40
  text "A" at 5295,3470 h40
  text "PA12" at 1525,3425 h40
  text "5V GND B A" at 3130,3370 h40
  text "B" at 5295,3365 h40
  text "PA15" at 1525,3325 h40
  text "EA-B" at 3980,3290 h40
  text "PB7" at 3630,3280 h40
  text "GND" at 5280,3270 h40
  text "PC10" at 1525,3225 h40
  text "EA-A" at 3980,3185 h40
  text "PB6" at 3630,3180 h40
  text "PC11" at 1525,3125 h40
  text "O1" at 5305,3110 h40
  text "PA11" at 3610,3085 h40
  text "A-IN2" at 3975,3080 h40
  text "PC12" at 1525,3025 h40
  text "PA10" at 3605,2985 h40
  text "B-IN2" at 3975,2985 h40
  text "O2" at 5305,2955 h40
  text "PB3" at 1525,2925 h40
  text "C-IN2" at 3975,2885 h40
  text "PA9" at 3630,2880 h40
  text "PB4" at 1525,2825 h40
  text "Vdd" at 5285,2790 h40
  text "PA8" at 3630,2785 h40
  text "D-IN2" at 3975,2785 h40
  text "GND" at 2140,2750 h40 r90
  text "SCL" at 2245,2750 h40 r90
  text "SDA" at 2340,2750 h40 r90
  text "AD0" at 2640,2750 h40 r90
  text "INT" at 2740,2750 h40 r90
  text "GND" at 1525,2725 h40
  text "3.3V" at 2040,2710 h40 r90
  text "PC9" at 3630,2690 h40
  text "A" at 5305,2690 h40
  text "A-IN1" at 3975,2685 h40
  text "BOOT0" at 1510,2625 h40
  text "B" at 5305,2590 h40
  text "PC8" at 3625,2585 h40
  text "A-EF" at 3975,2585 h40
  text "3.3V" at 1525,2505 h40
  text "PC7" at 3620,2485 h40
  text "EB-B" at 3975,2485 h40
  text "GND" at 5275,2485 h40
  text "PC6" at 3620,2390 h40
  text "EB-A" at 3980,2385 h40
  text "O1" at 5300,2330 h40
  text "PC13" at 1525,2325 h40
  text "PB1" at 3625,2285 h40
  text "B-IN1" at 3975,2285 h40
  text "PC0" at 1525,2225 h40
  text "PB0" at 3625,2185 h40
  text "B-EF" at 3975,2185 h40
  text "O2" at 5300,2185 h40
  text "PC1" at 1525,2125 h40
  text "PC5" at 3625,2085 h40
  text "C-IN1" at 3975,2080 h40
  text "PC2" at 1525,2020 h40
  text "Vdd" at 5280,2020 h40
  text "PC4" at 3625,1985 h40
  text "C-EF" at 3975,1985 h40
  text "PC3" at 1525,1925 h40
  text "A" at 5305,1915 h40
  text "PA7" at 3620,1885 h40
  text "EC-B" at 3975,1885 h40
  text "GND" at 1525,1825 h40
  text "B" at 5305,1815 h40
  text "PA6" at 3620,1790 h40
  text "EC-A" at 3975,1785 h40
  text "GND" at 1525,1725 h40
  text "GND" at 5280,1715 h40
  text "PA5" at 3615,1685 h40
  text "D-IN1" at 3975,1685 h40
  text "PB2" at 1525,1625 h40
  text "PA4" at 3620,1590 h40
  text "D-EF" at 3975,1580 h40
  text "O1" at 5305,1550 h40
  text "3.3V" at 1525,1525 h40
  text "3.3V" at 3170,1505 h40 r90
  text "PB12" at 3270,1505 h40 r90
  text "PB15" at 3370,1505 h40 r90
  text "PB10" at 3470,1505 h40 r90
  text "ED-A" at 3975,1490 h40
  text "PA0" at 3625,1480 h40
  text "3.3V" at 1525,1420 h40
  text "O2" at 5305,1415 h40
  text "TX RX GND 5V" at 1900,1410 h40
  text "PA1" at 3630,1385 h40
  text "ED-B" at 3975,1385 h40
  text "GND" at 3170,1150 h40 r90
  text "PB11" at 3270,1150 h40 r90
  text "PB13" at 3370,1140 h40 r90
  text "PB14" at 3470,1140 h40 r90

## Text inside footprints (layer, text, board x,y; h text height)
P1: Top Overlay "2" at 1705,4350 h40 r270; Top Overlay "1" at 1605,4330 h40 r270; Top Overlay "9" at 1605,3790 h40 r270; Top Overlay "10" at 1705,3790 h40 r270
P7: Top Overlay "8" at 3515,1415 h40; Top Overlay "7" at 3515,1315 h40; Top Overlay "1" at 3075,1315 h40; Top Overlay "2" at 3055,1415 h40
P8: Top Overlay "39" at 3775,1320 h40 r270; Top Overlay "40" at 3875,1320 h40 r270; Top Overlay "2" at 3875,3400 h40 r270; Top Overlay "1" at 3775,3400 h40 r270